# EAGLE board Lipo �Charger (EAGLE 6.0)
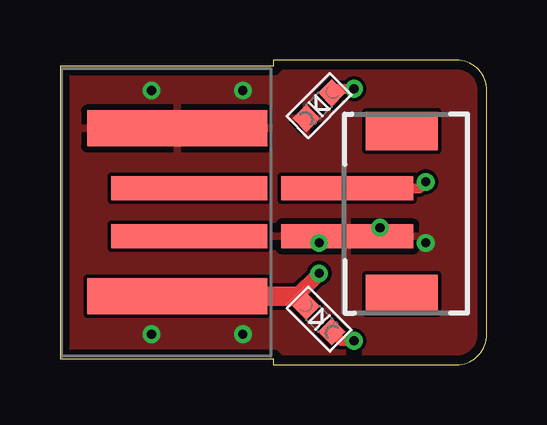
[diagram p0: board, top side]
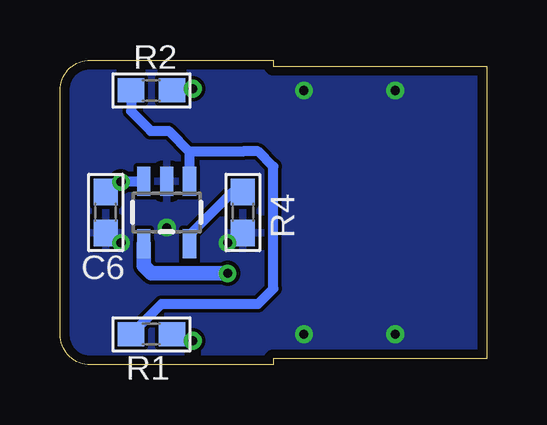
[diagram p1: board, bottom side, seen from below]

Size 17.78 x 12.7 mm. Coordinates in mm from the lower left corner, seen from the top.
Outline: 0,0.25 8.89,0.25 8.89,0 16.51,0 arc90 17.78,1.27 17.78,11.43 arc90 16.51,12.7 8.89,12.7 8.89,12.45 0,12.45 0,0.25
Copper layers (1*16): Top 0.0356mm / dielectric 1.5011mm / Bottom 0.0356mm
Design rules: minimum track width 6mil, minimum drill 13mil, track to track 6mil, track to pad 6mil, pad to pad 6mil, via to via 6mil, smd to smd 6mil, copper to edge 15mil, drill to drill 6mil, minimum pad ring 7mil, minimum via ring 7mil, stop-mask expansion 4mil, vias tented up to drill 0mil, thermal gap 10mil

## Footprints (pad centres in the part's own frame; a part is rotated, then mirrored left to right if it is on the bottom)
0603 = smd 1.1 x 1: 1 -0.85,0; 2 0.85,0
CHIPLED_0603 = smd 0.8 x 0.8: A 0,-0.75; C 0,0.75
JST-2-SMD-VERT = smd 1 x 5.5: GND 1,-2; VCC -1,-2 | smd 1.6 x 3: P$1 -3.4,0.27; P$2 3.4,0.27
SOT23-5 = smd 0.55 x 1.2: 1 -0.95,-1.3; 2 0,-1.3; 3 0.95,-1.3; 4 0.95,1.3; 5 -0.95,1.3
USB-A-PCB = smd 7.5 x 1.5: 5V -0.2,-3.5; GND -0.2,3.5 | smd 6.5 x 1: USB_M 0.3,-1; USB_P 0.3,1

## Placement (x,y rotation side)
C6  4.7  [0603]  15.88,6.35 90 bottom
CHRG  [CHIPLED_0603]  10.79,1.91 225 top
DONE  [CHIPLED_0603]  10.79,10.79 135 top
JP1  [JST-2-SMD-VERT]  13.97,6.35 270 top
R1  1k  [0603]  13.97,1.27 0 bottom
R2  1k  [0603]  13.97,11.43 180 bottom
R4  2k  [0603]  10.16,6.35 270 bottom
U3  MCP73831  [SOT23-5]  13.34,6.35 180 bottom
X1  USBPCB  [USB-A-PCB]  5.08,6.35 0 top

## Library data of the parts
C6 CHRG DONE R1 R2 R4 = microbuilder
JP1 U3 X1 = SparkFun

## Nets
5.0V: CHRG.A U3.4 X1.5V
GND: C6.1 DONE.C JP1.GND R4.2 U3.2 X1.GND
N$1: R4.1 U3.5
N$2: CHRG.C R1.2
N$4: DONE.A R2.1
STATE: R1.1 R2.2 U3.1
VBAT: C6.2 JP1.VCC U3.3

## Tracks (layer width: path | path; a pad name or v marks a point on that pad's centre or on a via)
5.0V  (via drill 0.38)
  Top 0.61: v10.79,3.81 10.79,3.79 9.85,2.85
  Top 0.813: X1.5V 9.85,2.85 CHRG.A
  Bottom 0.61: U3.4 14.29,4.12 13.97,3.81 v10.79,3.81
GND  (via drill 0.38)
  other vias: 15.24,5.08 13.34,5.71 10.79,5.08 7.62,11.43 3.81,11.43 3.81,1.27 7.62,1.27
  pour Bottom: 0,0 17.78,0 17.78,12.7 0,12.7
  pour Top (rank 6): 0,0 17.78,0 17.78,12.7 0,12.7
N$1
  Bottom 0.406: U3.5 12.38,5.39 10.58,7.2 R4.1
N$2  (via drill 0.38)
  Top 0.406: CHRG.C 11.7,1 v12.25,1
  Bottom 0.406: v12.25,1 12.85,1 R1.2
N$4  (via drill 0.38)
  Top 0.406: DONE.A 11.5,11.5 v12.25,11.5
  Bottom 0.406: v12.25,11.5 13.05,11.5 R2.1
STATE
  Bottom 0.406: R2.2 14.82,10.57 14,9.75 13.25,9.75 12.38,8.88 | 12.38,8.88 U3.1 | R1.1 13.55,2.54 9.53,2.54 8.89,3.17 8.89,8.26 9.53,8.89 10.16,8.89 10.16,8.88 12.38,8.88
VBAT  (via drill 0.38)
  Top 0.406: JP1.VCC 14.97,7.35 v15.24,7.62
  Bottom 0.406: C6.2 15.46,7.62 v15.24,7.62 14.31,7.62 U3.3